# EAGLE board ledterne_test-display (EAGLE 7.3.0)
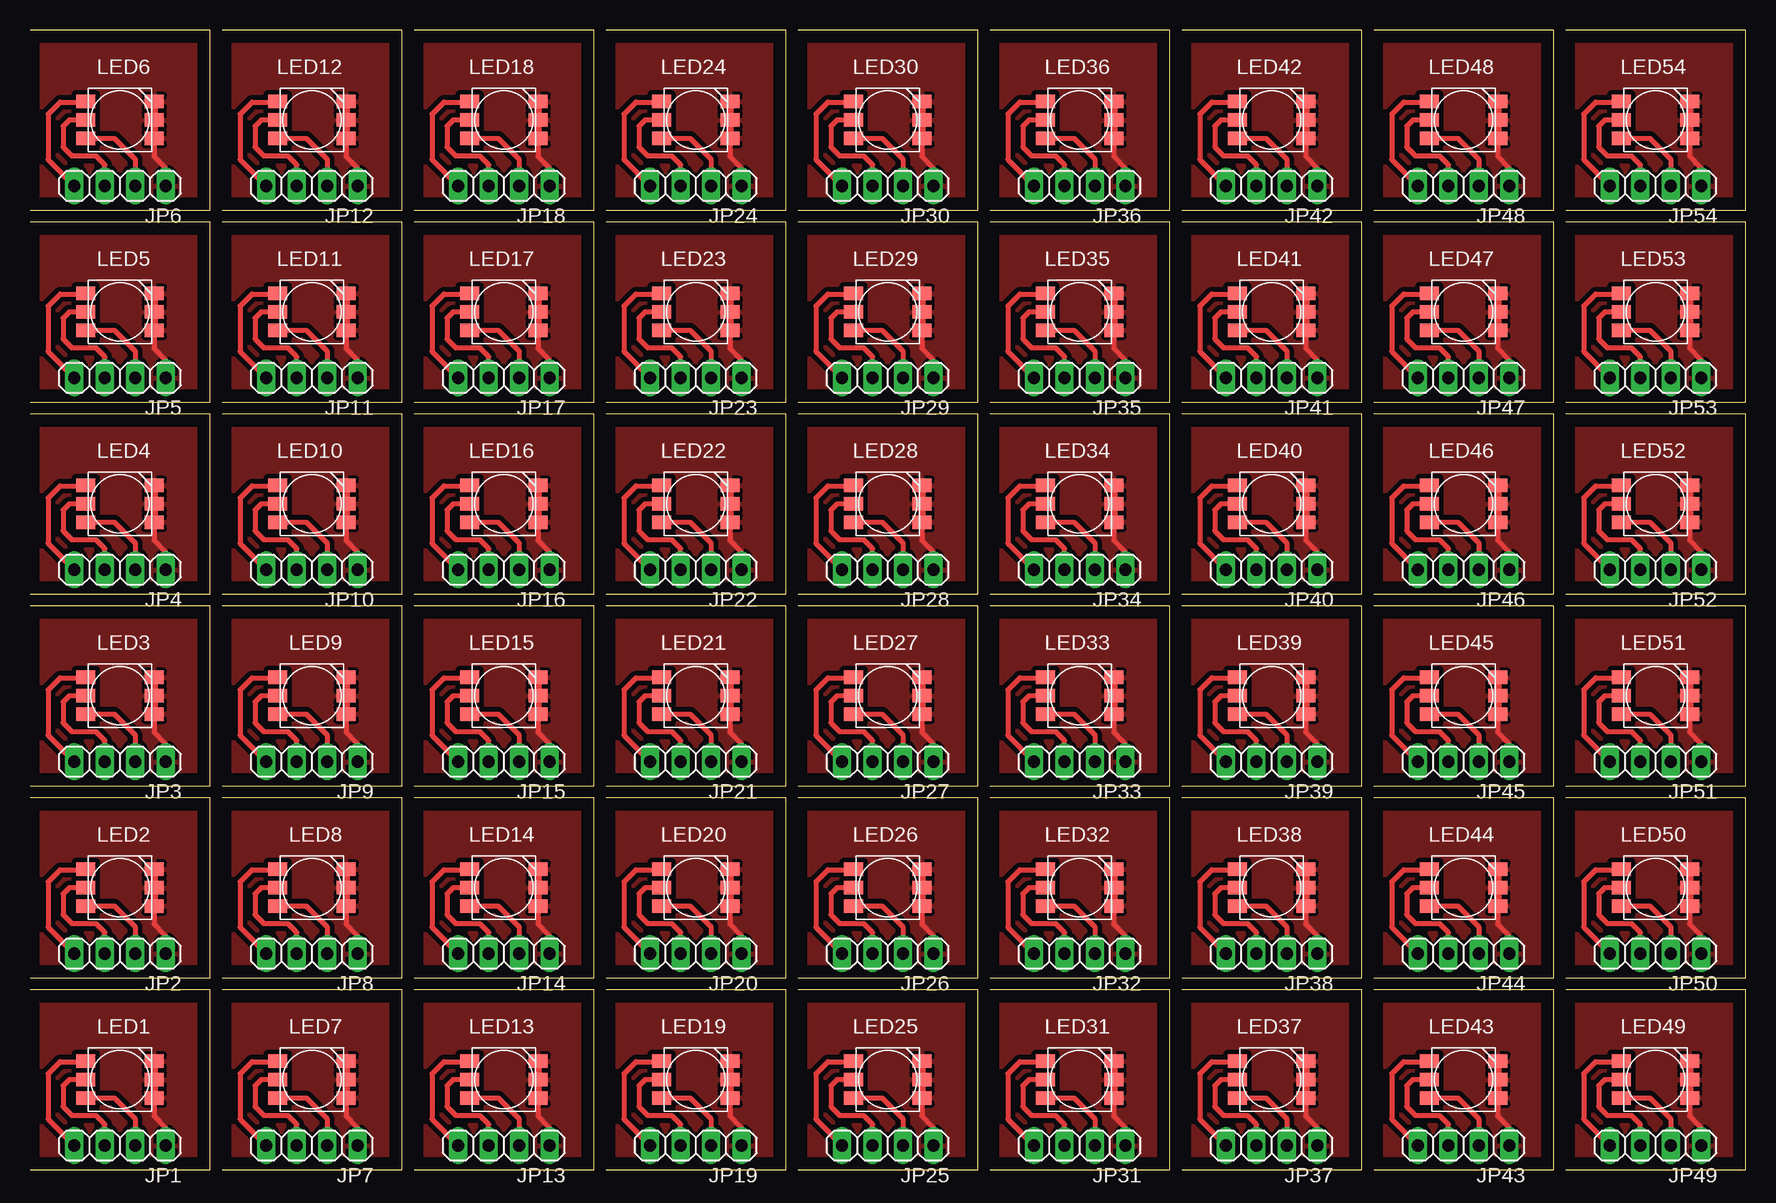
[diagram p0: board, top side]

Size 143 x 95 mm. Coordinates in mm from the lower left corner, seen from the top.
Outline: 0,0 15,0 15,15 0,15
Outline: 0,16 15,16 15,31 0,31
Outline: 0,32 15,32 15,47 0,47
Outline: 0,48 15,48 15,63 0,63
Outline: 0,64 15,64 15,79 0,79
Outline: 0,80 15,80 15,95 0,95
Outline: 16,0 31,0 31,15 16,15
Outline: 16,16 31,16 31,31 16,31
Outline: 16,32 31,32 31,47 16,47
Outline: 16,48 31,48 31,63 16,63
Outline: 16,64 31,64 31,79 16,79
Outline: 16,80 31,80 31,95 16,95
Outline: 32,0 47,0 47,15 32,15
Outline: 32,16 47,16 47,31 32,31
Outline: 32,32 47,32 47,47 32,47
Outline: 32,48 47,48 47,63 32,63
Outline: 32,64 47,64 47,79 32,79
Outline: 32,80 47,80 47,95 32,95
Outline: 48,0 63,0 63,15 48,15
Outline: 48,16 63,16 63,31 48,31
Outline: 48,32 63,32 63,47 48,47
Outline: 48,48 63,48 63,63 48,63
Outline: 48,64 63,64 63,79 48,79
Outline: 48,80 63,80 63,95 48,95
Outline: 64,0 79,0 79,15 64,15
Outline: 64,16 79,16 79,31 64,31
Outline: 64,32 79,32 79,47 64,47
Outline: 64,48 79,48 79,63 64,63
Outline: 64,64 79,64 79,79 64,79
Outline: 64,80 79,80 79,95 64,95
Outline: 80,0 95,0 95,15 80,15
Outline: 80,16 95,16 95,31 80,31
Outline: 80,32 95,32 95,47 80,47
Outline: 80,48 95,48 95,63 80,63
Outline: 80,64 95,64 95,79 80,79
Outline: 80,80 95,80 95,95 80,95
Outline: 96,0 111,0 111,15 96,15
Outline: 96,16 111,16 111,31 96,31
Outline: 96,32 111,32 111,47 96,47
Outline: 96,48 111,48 111,63 96,63
Outline: 96,64 111,64 111,79 96,79
Outline: 96,80 111,80 111,95 96,95
Outline: 112,0 127,0 127,15 112,15
Outline: 112,16 127,16 127,31 112,31
Outline: 112,32 127,32 127,47 112,47
Outline: 112,48 127,48 127,63 112,63
Outline: 112,64 127,64 127,79 112,79
Outline: 112,80 127,80 127,95 112,95
Outline: 128,0 143,0 143,15 128,15
Outline: 128,16 143,16 143,31 128,31
Outline: 128,32 143,32 143,47 128,47
Outline: 128,48 143,48 143,63 128,63
Outline: 128,64 143,64 143,79 128,79
Outline: 128,80 143,80 143,95 128,95
Copper layers (1*16): Top 0.035mm / dielectric 1.5mm / Bottom 0.035mm
Design rules "default *": minimum track width 10mil, minimum drill 24mil, track to track 8mil, track to pad 8mil, pad to pad 8mil, via to via 8mil, smd to smd 8mil, copper to edge 40mil, drill to drill 8mil, minimum pad ring 10mil, minimum via ring 8mil, stop-mask expansion 4mil, vias tented up to drill 0mil, thermal gap 10mil

## Footprints (pad centres in the part's own frame; a part is rotated, then mirrored left to right if it is on the bottom)
1X04 = drill 1.016 long: 1 -3.81,0; 2 -1.27,0; 3 1.27,0; 4 3.81,0
SMD_5252 = smd 1.6 x 1.116: P1 -2.85,-1.54; P2 -2.85,0; P3 -2.85,1.54; P4 2.85,1.54; P5 2.85,0; P6 2.85,-1.54

## Placement (x,y rotation side)
JP1  [1X04]  7.5,2 180 top
JP2  [1X04]  7.5,18 180 top
JP3  [1X04]  7.5,34 180 top
JP4  [1X04]  7.5,50 180 top
JP5  [1X04]  7.5,66 180 top
JP6  [1X04]  7.5,82 180 top
JP7  [1X04]  23.5,2 180 top
JP8  [1X04]  23.5,18 180 top
JP9  [1X04]  23.5,34 180 top
JP10  [1X04]  23.5,50 180 top
JP11  [1X04]  23.5,66 180 top
JP12  [1X04]  23.5,82 180 top
JP13  [1X04]  39.5,2 180 top
JP14  [1X04]  39.5,18 180 top
JP15  [1X04]  39.5,34 180 top
JP16  [1X04]  39.5,50 180 top
JP17  [1X04]  39.5,66 180 top
JP18  [1X04]  39.5,82 180 top
JP19  [1X04]  55.5,2 180 top
JP20  [1X04]  55.5,18 180 top
JP21  [1X04]  55.5,34 180 top
JP22  [1X04]  55.5,50 180 top
JP23  [1X04]  55.5,66 180 top
JP24  [1X04]  55.5,82 180 top
JP25  [1X04]  71.5,2 180 top
JP26  [1X04]  71.5,18 180 top
JP27  [1X04]  71.5,34 180 top
JP28  [1X04]  71.5,50 180 top
JP29  [1X04]  71.5,66 180 top
JP30  [1X04]  71.5,82 180 top
JP31  [1X04]  87.5,2 180 top
JP32  [1X04]  87.5,18 180 top
JP33  [1X04]  87.5,34 180 top
JP34  [1X04]  87.5,50 180 top
JP35  [1X04]  87.5,66 180 top
JP36  [1X04]  87.5,82 180 top
JP37  [1X04]  103.5,2 180 top
JP38  [1X04]  103.5,18 180 top
JP39  [1X04]  103.5,34 180 top
JP40  [1X04]  103.5,50 180 top
JP41  [1X04]  103.5,66 180 top
JP42  [1X04]  103.5,82 180 top
JP43  [1X04]  119.5,2 180 top
JP44  [1X04]  119.5,18 180 top
JP45  [1X04]  119.5,34 180 top
JP46  [1X04]  119.5,50 180 top
JP47  [1X04]  119.5,66 180 top
JP48  [1X04]  119.5,82 180 top
JP49  [1X04]  135.5,2 180 top
JP50  [1X04]  135.5,18 180 top
JP51  [1X04]  135.5,34 180 top
JP52  [1X04]  135.5,50 180 top
JP53  [1X04]  135.5,66 180 top
JP54  [1X04]  135.5,82 180 top
LED1  RGB-5252  [SMD_5252]  7.5,7.5 180 top
LED2  RGB-5252  [SMD_5252]  7.5,23.5 180 top
LED3  RGB-5252  [SMD_5252]  7.5,39.5 180 top
LED4  RGB-5252  [SMD_5252]  7.5,55.5 180 top
LED5  RGB-5252  [SMD_5252]  7.5,71.5 180 top
LED6  RGB-5252  [SMD_5252]  7.5,87.5 180 top
LED7  RGB-5252  [SMD_5252]  23.5,7.5 180 top
LED8  RGB-5252  [SMD_5252]  23.5,23.5 180 top
LED9  RGB-5252  [SMD_5252]  23.5,39.5 180 top
LED10  RGB-5252  [SMD_5252]  23.5,55.5 180 top
LED11  RGB-5252  [SMD_5252]  23.5,71.5 180 top
LED12  RGB-5252  [SMD_5252]  23.5,87.5 180 top
LED13  RGB-5252  [SMD_5252]  39.5,7.5 180 top
LED14  RGB-5252  [SMD_5252]  39.5,23.5 180 top
LED15  RGB-5252  [SMD_5252]  39.5,39.5 180 top
LED16  RGB-5252  [SMD_5252]  39.5,55.5 180 top
LED17  RGB-5252  [SMD_5252]  39.5,71.5 180 top
LED18  RGB-5252  [SMD_5252]  39.5,87.5 180 top
LED19  RGB-5252  [SMD_5252]  55.5,7.5 180 top
LED20  RGB-5252  [SMD_5252]  55.5,23.5 180 top
LED21  RGB-5252  [SMD_5252]  55.5,39.5 180 top
LED22  RGB-5252  [SMD_5252]  55.5,55.5 180 top
LED23  RGB-5252  [SMD_5252]  55.5,71.5 180 top
LED24  RGB-5252  [SMD_5252]  55.5,87.5 180 top
LED25  RGB-5252  [SMD_5252]  71.5,7.5 180 top
LED26  RGB-5252  [SMD_5252]  71.5,23.5 180 top
LED27  RGB-5252  [SMD_5252]  71.5,39.5 180 top
LED28  RGB-5252  [SMD_5252]  71.5,55.5 180 top
LED29  RGB-5252  [SMD_5252]  71.5,71.5 180 top
LED30  RGB-5252  [SMD_5252]  71.5,87.5 180 top
LED31  RGB-5252  [SMD_5252]  87.5,7.5 180 top
LED32  RGB-5252  [SMD_5252]  87.5,23.5 180 top
LED33  RGB-5252  [SMD_5252]  87.5,39.5 180 top
LED34  RGB-5252  [SMD_5252]  87.5,55.5 180 top
LED35  RGB-5252  [SMD_5252]  87.5,71.5 180 top
LED36  RGB-5252  [SMD_5252]  87.5,87.5 180 top
LED37  RGB-5252  [SMD_5252]  103.5,7.5 180 top
LED38  RGB-5252  [SMD_5252]  103.5,23.5 180 top
LED39  RGB-5252  [SMD_5252]  103.5,39.5 180 top
LED40  RGB-5252  [SMD_5252]  103.5,55.5 180 top
LED41  RGB-5252  [SMD_5252]  103.5,71.5 180 top
LED42  RGB-5252  [SMD_5252]  103.5,87.5 180 top
LED43  RGB-5252  [SMD_5252]  119.5,7.5 180 top
LED44  RGB-5252  [SMD_5252]  119.5,23.5 180 top
LED45  RGB-5252  [SMD_5252]  119.5,39.5 180 top
LED46  RGB-5252  [SMD_5252]  119.5,55.5 180 top
LED47  RGB-5252  [SMD_5252]  119.5,71.5 180 top
LED48  RGB-5252  [SMD_5252]  119.5,87.5 180 top
LED49  RGB-5252  [SMD_5252]  135.5,7.5 180 top
LED50  RGB-5252  [SMD_5252]  135.5,23.5 180 top
LED51  RGB-5252  [SMD_5252]  135.5,39.5 180 top
LED52  RGB-5252  [SMD_5252]  135.5,55.5 180 top
LED53  RGB-5252  [SMD_5252]  135.5,71.5 180 top
LED54  RGB-5252  [SMD_5252]  135.5,87.5 180 top

## Library data of the parts
JP1-JP54 = pinhead
LED1-LED54 = led_rgb

## Nets
GND: JP1.1 LED1.P1 LED1.P2 LED1.P3
GND1: JP2.1 LED2.P1 LED2.P2 LED2.P3
GND2: JP3.1 LED3.P1 LED3.P2 LED3.P3
GND3: JP4.1 LED4.P1 LED4.P2 LED4.P3
GND4: JP5.1 LED5.P1 LED5.P2 LED5.P3
GND5: JP6.1 LED6.P1 LED6.P2 LED6.P3
GND6: JP7.1 LED7.P1 LED7.P2 LED7.P3
GND7: JP8.1 LED8.P1 LED8.P2 LED8.P3
GND8: JP9.1 LED9.P1 LED9.P2 LED9.P3
GND9: JP10.1 LED10.P1 LED10.P2 LED10.P3
GND10: JP11.1 LED11.P1 LED11.P2 LED11.P3
GND11: JP12.1 LED12.P1 LED12.P2 LED12.P3
GND12: JP13.1 LED13.P1 LED13.P2 LED13.P3
GND13: JP14.1 LED14.P1 LED14.P2 LED14.P3
GND14: JP15.1 LED15.P1 LED15.P2 LED15.P3
GND15: JP16.1 LED16.P1 LED16.P2 LED16.P3
GND16: JP17.1 LED17.P1 LED17.P2 LED17.P3
GND17: JP18.1 LED18.P1 LED18.P2 LED18.P3
GND18: JP19.1 LED19.P1 LED19.P2 LED19.P3
GND19: JP20.1 LED20.P1 LED20.P2 LED20.P3
GND20: JP21.1 LED21.P1 LED21.P2 LED21.P3
GND21: JP22.1 LED22.P1 LED22.P2 LED22.P3
GND22: JP23.1 LED23.P1 LED23.P2 LED23.P3
GND23: JP24.1 LED24.P1 LED24.P2 LED24.P3
GND24: JP25.1 LED25.P1 LED25.P2 LED25.P3
GND25: JP26.1 LED26.P1 LED26.P2 LED26.P3
GND26: JP27.1 LED27.P1 LED27.P2 LED27.P3
GND27: JP28.1 LED28.P1 LED28.P2 LED28.P3
GND28: JP29.1 LED29.P1 LED29.P2 LED29.P3
GND29: JP30.1 LED30.P1 LED30.P2 LED30.P3
GND30: JP31.1 LED31.P1 LED31.P2 LED31.P3
GND31: JP32.1 LED32.P1 LED32.P2 LED32.P3
GND32: JP33.1 LED33.P1 LED33.P2 LED33.P3
GND33: JP34.1 LED34.P1 LED34.P2 LED34.P3
GND34: JP35.1 LED35.P1 LED35.P2 LED35.P3
GND35: JP36.1 LED36.P1 LED36.P2 LED36.P3
GND36: JP37.1 LED37.P1 LED37.P2 LED37.P3
GND37: JP38.1 LED38.P1 LED38.P2 LED38.P3
GND38: JP39.1 LED39.P1 LED39.P2 LED39.P3
GND39: JP40.1 LED40.P1 LED40.P2 LED40.P3
GND40: JP41.1 LED41.P1 LED41.P2 LED41.P3
GND41: JP42.1 LED42.P1 LED42.P2 LED42.P3
GND42: JP43.1 LED43.P1 LED43.P2 LED43.P3
GND43: JP44.1 LED44.P1 LED44.P2 LED44.P3
GND44: JP45.1 LED45.P1 LED45.P2 LED45.P3
GND45: JP46.1 LED46.P1 LED46.P2 LED46.P3
GND46: JP47.1 LED47.P1 LED47.P2 LED47.P3
GND47: JP48.1 LED48.P1 LED48.P2 LED48.P3
GND48: JP49.1 LED49.P1 LED49.P2 LED49.P3
GND49: JP50.1 LED50.P1 LED50.P2 LED50.P3
GND50: JP51.1 LED51.P1 LED51.P2 LED51.P3
GND51: JP52.1 LED52.P1 LED52.P2 LED52.P3
GND52: JP53.1 LED53.P1 LED53.P2 LED53.P3
GND53: JP54.1 LED54.P1 LED54.P2 LED54.P3
N$1: JP2.2 LED2.P4
N$2: JP2.3 LED2.P5
N$3: JP1.2 LED1.P4
N$4: JP1.3 LED1.P5
N$5: JP1.4 LED1.P6
N$6: JP2.4 LED2.P6
N$7: JP3.2 LED3.P4
N$8: JP3.3 LED3.P5
N$9: JP3.4 LED3.P6
N$10: JP4.2 LED4.P4
N$11: JP4.3 LED4.P5
N$12: JP4.4 LED4.P6
N$13: JP5.2 LED5.P4
N$14: JP5.3 LED5.P5
N$15: JP5.4 LED5.P6
N$16: JP6.2 LED6.P4
N$17: JP6.3 LED6.P5
N$18: JP6.4 LED6.P6
N$19: JP7.2 LED7.P4
N$20: JP7.3 LED7.P5
N$21: JP7.4 LED7.P6
N$22: JP8.2 LED8.P4
N$23: JP8.3 LED8.P5
N$24: JP8.4 LED8.P6
N$25: JP9.2 LED9.P4
N$26: JP9.3 LED9.P5
N$27: JP9.4 LED9.P6
N$28: JP10.2 LED10.P4
N$29: JP10.3 LED10.P5
N$30: JP10.4 LED10.P6
N$31: JP11.2 LED11.P4
N$32: JP11.3 LED11.P5
N$33: JP11.4 LED11.P6
N$34: JP12.2 LED12.P4
N$35: JP12.3 LED12.P5
N$36: JP12.4 LED12.P6
N$37: JP13.2 LED13.P4
N$38: JP13.3 LED13.P5
N$39: JP13.4 LED13.P6
N$40: JP14.2 LED14.P4
N$41: JP14.3 LED14.P5
N$42: JP14.4 LED14.P6
N$43: JP15.2 LED15.P4
N$44: JP15.3 LED15.P5
N$45: JP15.4 LED15.P6
N$46: JP16.2 LED16.P4
N$47: JP16.3 LED16.P5
N$48: JP16.4 LED16.P6
N$49: JP17.2 LED17.P4
N$50: JP17.3 LED17.P5
N$51: JP17.4 LED17.P6
N$52: JP18.2 LED18.P4
N$53: JP18.3 LED18.P5
N$54: JP18.4 LED18.P6
N$55: JP19.2 LED19.P4
N$56: JP19.3 LED19.P5
N$57: JP19.4 LED19.P6
N$58: JP20.2 LED20.P4
N$59: JP20.3 LED20.P5
N$60: JP20.4 LED20.P6
N$61: JP21.2 LED21.P4
N$62: JP21.3 LED21.P5
N$63: JP21.4 LED21.P6
N$64: JP22.2 LED22.P4
N$65: JP22.3 LED22.P5
N$66: JP22.4 LED22.P6
N$67: JP23.2 LED23.P4
N$68: JP23.3 LED23.P5
N$69: JP23.4 LED23.P6
N$70: JP24.2 LED24.P4
N$71: JP24.3 LED24.P5
N$72: JP24.4 LED24.P6
N$73: JP25.2 LED25.P4
N$74: JP25.3 LED25.P5
N$75: JP25.4 LED25.P6
N$76: JP26.2 LED26.P4
N$77: JP26.3 LED26.P5
N$78: JP26.4 LED26.P6
N$79: JP27.2 LED27.P4
N$80: JP27.3 LED27.P5
N$81: JP27.4 LED27.P6
N$82: JP28.2 LED28.P4
N$83: JP28.3 LED28.P5
N$84: JP28.4 LED28.P6
N$85: JP29.2 LED29.P4
N$86: JP29.3 LED29.P5
N$87: JP29.4 LED29.P6
N$88: JP30.2 LED30.P4
N$89: JP30.3 LED30.P5
N$90: JP30.4 LED30.P6
N$91: JP31.2 LED31.P4
N$92: JP31.3 LED31.P5
N$93: JP31.4 LED31.P6
N$94: JP32.2 LED32.P4
N$95: JP32.3 LED32.P5
N$96: JP32.4 LED32.P6
N$97: JP33.2 LED33.P4
N$98: JP33.3 LED33.P5
N$99: JP33.4 LED33.P6
N$100: JP34.2 LED34.P4
N$101: JP34.3 LED34.P5
N$102: JP34.4 LED34.P6
N$103: JP35.2 LED35.P4
N$104: JP35.3 LED35.P5
N$105: JP35.4 LED35.P6
N$106: JP36.2 LED36.P4
N$107: JP36.3 LED36.P5
N$108: JP36.4 LED36.P6
N$109: JP37.2 LED37.P4
N$110: JP37.3 LED37.P5
N$111: JP37.4 LED37.P6
N$112: JP38.2 LED38.P4
N$113: JP38.3 LED38.P5
N$114: JP38.4 LED38.P6
N$115: JP39.2 LED39.P4
N$116: JP39.3 LED39.P5
N$117: JP39.4 LED39.P6
N$118: JP40.2 LED40.P4
N$119: JP40.3 LED40.P5
N$120: JP40.4 LED40.P6
N$121: JP41.2 LED41.P4
N$122: JP41.3 LED41.P5
N$123: JP41.4 LED41.P6
N$124: JP42.2 LED42.P4
N$125: JP42.3 LED42.P5
N$126: JP42.4 LED42.P6
N$127: JP43.2 LED43.P4
N$128: JP43.3 LED43.P5
N$129: JP43.4 LED43.P6
N$130: JP44.2 LED44.P4
N$131: JP44.3 LED44.P5
N$132: JP44.4 LED44.P6
N$133: JP45.2 LED45.P4
N$134: JP45.3 LED45.P5
N$135: JP45.4 LED45.P6
N$136: JP46.2 LED46.P4
N$137: JP46.3 LED46.P5
N$138: JP46.4 LED46.P6
N$139: JP47.2 LED47.P4
N$140: JP47.3 LED47.P5
N$141: JP47.4 LED47.P6
N$142: JP48.2 LED48.P4
N$143: JP48.3 LED48.P5
N$144: JP48.4 LED48.P6
N$145: JP49.2 LED49.P4
N$146: JP49.3 LED49.P5
N$147: JP49.4 LED49.P6
N$148: JP50.2 LED50.P4
N$149: JP50.3 LED50.P5
N$150: JP50.4 LED50.P6
N$151: JP51.2 LED51.P4
N$152: JP51.3 LED51.P5
N$153: JP51.4 LED51.P6
N$154: JP52.2 LED52.P4
N$155: JP52.3 LED52.P5
N$156: JP52.4 LED52.P6
N$157: JP53.2 LED53.P4
N$158: JP53.3 LED53.P5
N$159: JP53.4 LED53.P6
N$160: JP54.2 LED54.P4
N$161: JP54.3 LED54.P5
N$162: JP54.4 LED54.P6

## Tracks (layer width: path | path; a pad name or v marks a point on that pad's centre or on a via)
GND
  Top 0.406: LED1.P3 10.35,4.46 11.31,3.5 JP1.1
  Top 0.61: LED1.P1 LED1.P2 LED1.P3
  pour Top (isolate 0.4): 1,14 14,14 14,1 1,1
GND1
  Top 0.406: LED2.P3 10.35,20.46 11.31,19.5 JP2.1
  Top 0.61: LED2.P1 LED2.P2 LED2.P3
  pour Top (isolate 0.4): 1,30 14,30 14,17 1,17
GND2
  Top 0.406: LED3.P3 10.35,36.46 11.31,35.5 JP3.1
  Top 0.61: LED3.P1 LED3.P2 LED3.P3
  pour Top (isolate 0.4): 1,46 14,46 14,33 1,33
GND3
  Top 0.406: LED4.P3 10.35,52.46 11.31,51.5 JP4.1
  Top 0.61: LED4.P1 LED4.P2 LED4.P3
  pour Top (isolate 0.4): 1,62 14,62 14,49 1,49
GND4
  Top 0.406: LED5.P3 10.35,68.46 11.31,67.5 JP5.1
  Top 0.61: LED5.P1 LED5.P2 LED5.P3
  pour Top (isolate 0.4): 1,78 14,78 14,65 1,65
GND5
  Top 0.406: LED6.P3 10.35,84.46 11.31,83.5 JP6.1
  Top 0.61: LED6.P1 LED6.P2 LED6.P3
  pour Top (isolate 0.4): 1,94 14,94 14,81 1,81
GND6
  Top 0.406: LED7.P3 26.35,4.46 27.31,3.5 JP7.1
  Top 0.61: LED7.P1 LED7.P2 LED7.P3
  pour Top (isolate 0.4): 17,14 30,14 30,1 17,1
GND7
  Top 0.406: LED8.P3 26.35,20.46 27.31,19.5 JP8.1
  Top 0.61: LED8.P1 LED8.P2 LED8.P3
  pour Top (isolate 0.4): 17,30 30,30 30,17 17,17
GND8
  Top 0.406: LED9.P3 26.35,36.46 27.31,35.5 JP9.1
  Top 0.61: LED9.P1 LED9.P2 LED9.P3
  pour Top (isolate 0.4): 17,46 30,46 30,33 17,33
GND9
  Top 0.406: LED10.P3 26.35,52.46 27.31,51.5 JP10.1
  Top 0.61: LED10.P1 LED10.P2 LED10.P3
  pour Top (isolate 0.4): 17,62 30,62 30,49 17,49
GND10
  Top 0.406: LED11.P3 26.35,68.46 27.31,67.5 JP11.1
  Top 0.61: LED11.P1 LED11.P2 LED11.P3
  pour Top (isolate 0.4): 17,78 30,78 30,65 17,65
GND11
  Top 0.406: LED12.P3 26.35,84.46 27.31,83.5 JP12.1
  Top 0.61: LED12.P1 LED12.P2 LED12.P3
  pour Top (isolate 0.4): 17,94 30,94 30,81 17,81
GND12
  Top 0.406: LED13.P3 42.35,4.46 43.31,3.5 JP13.1
  Top 0.61: LED13.P1 LED13.P2 LED13.P3
  pour Top (isolate 0.4): 33,14 46,14 46,1 33,1
GND13
  Top 0.406: LED14.P3 42.35,20.46 43.31,19.5 JP14.1
  Top 0.61: LED14.P1 LED14.P2 LED14.P3
  pour Top (isolate 0.4): 33,30 46,30 46,17 33,17
GND14
  Top 0.406: LED15.P3 42.35,36.46 43.31,35.5 JP15.1
  Top 0.61: LED15.P1 LED15.P2 LED15.P3
  pour Top (isolate 0.4): 33,46 46,46 46,33 33,33
GND15
  Top 0.406: LED16.P3 42.35,52.46 43.31,51.5 JP16.1
  Top 0.61: LED16.P1 LED16.P2 LED16.P3
  pour Top (isolate 0.4): 33,62 46,62 46,49 33,49
GND16
  Top 0.406: LED17.P3 42.35,68.46 43.31,67.5 JP17.1
  Top 0.61: LED17.P1 LED17.P2 LED17.P3
  pour Top (isolate 0.4): 33,78 46,78 46,65 33,65
GND17
  Top 0.406: LED18.P3 42.35,84.46 43.31,83.5 JP18.1
  Top 0.61: LED18.P1 LED18.P2 LED18.P3
  pour Top (isolate 0.4): 33,94 46,94 46,81 33,81
GND18
  Top 0.406: LED19.P3 58.35,4.46 59.31,3.5 JP19.1
  Top 0.61: LED19.P1 LED19.P2 LED19.P3
  pour Top (isolate 0.4): 49,14 62,14 62,1 49,1
GND19
  Top 0.406: LED20.P3 58.35,20.46 59.31,19.5 JP20.1
  Top 0.61: LED20.P1 LED20.P2 LED20.P3
  pour Top (isolate 0.4): 49,30 62,30 62,17 49,17
GND20
  Top 0.406: LED21.P3 58.35,36.46 59.31,35.5 JP21.1
  Top 0.61: LED21.P1 LED21.P2 LED21.P3
  pour Top (isolate 0.4): 49,46 62,46 62,33 49,33
GND21
  Top 0.406: LED22.P3 58.35,52.46 59.31,51.5 JP22.1
  Top 0.61: LED22.P1 LED22.P2 LED22.P3
  pour Top (isolate 0.4): 49,62 62,62 62,49 49,49
GND22
  Top 0.406: LED23.P3 58.35,68.46 59.31,67.5 JP23.1
  Top 0.61: LED23.P1 LED23.P2 LED23.P3
  pour Top (isolate 0.4): 49,78 62,78 62,65 49,65
GND23
  Top 0.406: LED24.P3 58.35,84.46 59.31,83.5 JP24.1
  Top 0.61: LED24.P1 LED24.P2 LED24.P3
  pour Top (isolate 0.4): 49,94 62,94 62,81 49,81
GND24
  Top 0.406: LED25.P3 74.35,4.46 75.31,3.5 JP25.1
  Top 0.61: LED25.P1 LED25.P2 LED25.P3
  pour Top (isolate 0.4): 65,14 78,14 78,1 65,1
GND25
  Top 0.406: LED26.P3 74.35,20.46 75.31,19.5 JP26.1
  Top 0.61: LED26.P1 LED26.P2 LED26.P3
  pour Top (isolate 0.4): 65,30 78,30 78,17 65,17
GND26
  Top 0.406: LED27.P3 74.35,36.46 75.31,35.5 JP27.1
  Top 0.61: LED27.P1 LED27.P2 LED27.P3
  pour Top (isolate 0.4): 65,46 78,46 78,33 65,33
GND27
  Top 0.406: LED28.P3 74.35,52.46 75.31,51.5 JP28.1
  Top 0.61: LED28.P1 LED28.P2 LED28.P3
  pour Top (isolate 0.4): 65,62 78,62 78,49 65,49
GND28
  Top 0.406: LED29.P3 74.35,68.46 75.31,67.5 JP29.1
  Top 0.61: LED29.P1 LED29.P2 LED29.P3
  pour Top (isolate 0.4): 65,78 78,78 78,65 65,65
GND29
  Top 0.406: LED30.P3 74.35,84.46 75.31,83.5 JP30.1
  Top 0.61: LED30.P1 LED30.P2 LED30.P3
  pour Top (isolate 0.4): 65,94 78,94 78,81 65,81
GND30
  Top 0.406: LED31.P3 90.35,4.46 91.31,3.5 JP31.1
  Top 0.61: LED31.P1 LED31.P2 LED31.P3
  pour Top (isolate 0.4): 81,14 94,14 94,1 81,1
GND31
  Top 0.406: LED32.P3 90.35,20.46 91.31,19.5 JP32.1
  Top 0.61: LED32.P1 LED32.P2 LED32.P3
  pour Top (isolate 0.4): 81,30 94,30 94,17 81,17
GND32
  Top 0.406: LED33.P3 90.35,36.46 91.31,35.5 JP33.1
  Top 0.61: LED33.P1 LED33.P2 LED33.P3
  pour Top (isolate 0.4): 81,46 94,46 94,33 81,33
GND33
  Top 0.406: LED34.P3 90.35,52.46 91.31,51.5 JP34.1
  Top 0.61: LED34.P1 LED34.P2 LED34.P3
  pour Top (isolate 0.4): 81,62 94,62 94,49 81,49
GND34
  Top 0.406: LED35.P3 90.35,68.46 91.31,67.5 JP35.1
  Top 0.61: LED35.P1 LED35.P2 LED35.P3
  pour Top (isolate 0.4): 81,78 94,78 94,65 81,65
GND35
  Top 0.406: LED36.P3 90.35,84.46 91.31,83.5 JP36.1
  Top 0.61: LED36.P1 LED36.P2 LED36.P3
  pour Top (isolate 0.4): 81,94 94,94 94,81 81,81
GND36
  Top 0.406: LED37.P3 106.35,4.46 107.31,3.5 JP37.1
  Top 0.61: LED37.P1 LED37.P2 LED37.P3
  pour Top (isolate 0.4): 97,14 110,14 110,1 97,1
GND37
  Top 0.406: LED38.P3 106.35,20.46 107.31,19.5 JP38.1
  Top 0.61: LED38.P1 LED38.P2 LED38.P3
  pour Top (isolate 0.4): 97,30 110,30 110,17 97,17
GND38
  Top 0.406: LED39.P3 106.35,36.46 107.31,35.5 JP39.1
  Top 0.61: LED39.P1 LED39.P2 LED39.P3
  pour Top (isolate 0.4): 97,46 110,46 110,33 97,33
GND39
  Top 0.406: LED40.P3 106.35,52.46 107.31,51.5 JP40.1
  Top 0.61: LED40.P1 LED40.P2 LED40.P3
  pour Top (isolate 0.4): 97,62 110,62 110,49 97,49
GND40
  Top 0.406: LED41.P3 106.35,68.46 107.31,67.5 JP41.1
  Top 0.61: LED41.P1 LED41.P2 LED41.P3
  pour Top (isolate 0.4): 97,78 110,78 110,65 97,65
GND41
  Top 0.406: LED42.P3 106.35,84.46 107.31,83.5 JP42.1
  Top 0.61: LED42.P1 LED42.P2 LED42.P3
  pour Top (isolate 0.4): 97,94 110,94 110,81 97,81
GND42
  Top 0.406: LED43.P3 122.35,4.46 123.31,3.5 JP43.1
  Top 0.61: LED43.P1 LED43.P2 LED43.P3
  pour Top (isolate 0.4): 113,14 126,14 126,1 113,1
GND43
  Top 0.406: LED44.P3 122.35,20.46 123.31,19.5 JP44.1
  Top 0.61: LED44.P1 LED44.P2 LED44.P3
  pour Top (isolate 0.4): 113,30 126,30 126,17 113,17
GND44
  Top 0.406: LED45.P3 122.35,36.46 123.31,35.5 JP45.1
  Top 0.61: LED45.P1 LED45.P2 LED45.P3
  pour Top (isolate 0.4): 113,46 126,46 126,33 113,33
GND45
  Top 0.406: LED46.P3 122.35,52.46 123.31,51.5 JP46.1
  Top 0.61: LED46.P1 LED46.P2 LED46.P3
  pour Top (isolate 0.4): 113,62 126,62 126,49 113,49
GND46
  Top 0.406: LED47.P3 122.35,68.46 123.31,67.5 JP47.1
  Top 0.61: LED47.P1 LED47.P2 LED47.P3
  pour Top (isolate 0.4): 113,78 126,78 126,65 113,65
GND47
  Top 0.406: LED48.P3 122.35,84.46 123.31,83.5 JP48.1
  Top 0.61: LED48.P1 LED48.P2 LED48.P3
  pour Top (isolate 0.4): 113,94 126,94 126,81 113,81
GND48
  Top 0.406: LED49.P3 138.35,4.46 139.31,3.5 JP49.1
  Top 0.61: LED49.P1 LED49.P2 LED49.P3
  pour Top (isolate 0.4): 129,14 142,14 142,1 129,1
GND49
  Top 0.406: LED50.P3 138.35,20.46 139.31,19.5 JP50.1
  Top 0.61: LED50.P1 LED50.P2 LED50.P3
  pour Top (isolate 0.4): 129,30 142,30 142,17 129,17
GND50
  Top 0.406: LED51.P3 138.35,36.46 139.31,35.5 JP51.1
  Top 0.61: LED51.P1 LED51.P2 LED51.P3
  pour Top (isolate 0.4): 129,46 142,46 142,33 129,33
GND51
  Top 0.406: LED52.P3 138.35,52.46 139.31,51.5 JP52.1
  Top 0.61: LED52.P1 LED52.P2 LED52.P3
  pour Top (isolate 0.4): 129,62 142,62 142,49 129,49
GND52
  Top 0.406: LED53.P3 138.35,68.46 139.31,67.5 JP53.1
  Top 0.61: LED53.P1 LED53.P2 LED53.P3
  pour Top (isolate 0.4): 129,78 142,78 142,65 129,65
GND53
  Top 0.406: LED54.P3 138.35,84.46 139.31,83.5 JP54.1
  Top 0.61: LED54.P1 LED54.P2 LED54.P3
  pour Top (isolate 0.4): 129,94 142,94 142,81 129,81
N$1
  Top 0.406: LED2.P4 7.04,21.96 8.77,20.23 JP2.2
N$2
  Top 0.406: LED2.P5 3.25,23.5 2.75,23 2.75,21.25 3.5,20.5 5.5,20.5 6.23,19.77 JP2.3
N$3
  Top 0.406: LED1.P4 7.04,5.96 8.77,4.23 JP1.2
N$4
  Top 0.406: LED1.P5 3.25,7.5 2.75,7 2.75,5.25 3.5,4.5 5.5,4.5 6.23,3.77 JP1.3
N$5
  Top 0.406: 4.61,9 2.5,9 1.5,8 1.5,4.19 JP1.4
  Top 0.61: 4.61,9 LED1.P6
N$6
  Top 0.406: 4.61,25 2.5,25 1.5,24 1.5,20.19 JP2.4
  Top 0.61: 4.61,25 LED2.P6
N$7
  Top 0.406: LED3.P4 7.04,37.96 8.77,36.23 JP3.2
N$8
  Top 0.406: LED3.P5 3.25,39.5 2.75,39 2.75,37.25 3.5,36.5 5.5,36.5 6.23,35.77 JP3.3
N$9
  Top 0.406: 4.61,41 2.5,41 1.5,40 1.5,36.19 JP3.4
  Top 0.61: 4.61,41 LED3.P6
N$10
  Top 0.406: LED4.P4 7.04,53.96 8.77,52.23 JP4.2
N$11
  Top 0.406: LED4.P5 3.25,55.5 2.75,55 2.75,53.25 3.5,52.5 5.5,52.5 6.23,51.77 JP4.3
N$12
  Top 0.406: 4.61,57 2.5,57 1.5,56 1.5,52.19 JP4.4
  Top 0.61: 4.61,57 LED4.P6
N$13
  Top 0.406: LED5.P4 7.04,69.96 8.77,68.23 JP5.2
N$14
  Top 0.406: LED5.P5 3.25,71.5 2.75,71 2.75,69.25 3.5,68.5 5.5,68.5 6.23,67.77 JP5.3
N$15
  Top 0.406: 4.61,73 2.5,73 1.5,72 1.5,68.19 JP5.4
  Top 0.61: 4.61,73 LED5.P6
N$16
  Top 0.406: LED6.P4 7.04,85.96 8.77,84.23 JP6.2
N$17
  Top 0.406: LED6.P5 3.25,87.5 2.75,87 2.75,85.25 3.5,84.5 5.5,84.5 6.23,83.77 JP6.3
N$18
  Top 0.406: 4.61,89 2.5,89 1.5,88 1.5,84.19 JP6.4
  Top 0.61: 4.61,89 LED6.P6
N$19
  Top 0.406: LED7.P4 23.04,5.96 24.77,4.23 JP7.2
N$20
  Top 0.406: LED7.P5 19.25,7.5 18.75,7 18.75,5.25 19.5,4.5 21.5,4.5 22.23,3.77 JP7.3
N$21
  Top 0.406: 20.61,9 18.5,9 17.5,8 17.5,4.19 JP7.4
  Top 0.61: 20.61,9 LED7.P6
N$22
  Top 0.406: LED8.P4 23.04,21.96 24.77,20.23 JP8.2
N$23
  Top 0.406: LED8.P5 19.25,23.5 18.75,23 18.75,21.25 19.5,20.5 21.5,20.5 22.23,19.77 JP8.3
N$24
  Top 0.406: 20.61,25 18.5,25 17.5,24 17.5,20.19 JP8.4
  Top 0.61: 20.61,25 LED8.P6
N$25
  Top 0.406: LED9.P4 23.04,37.96 24.77,36.23 JP9.2
N$26
  Top 0.406: LED9.P5 19.25,39.5 18.75,39 18.75,37.25 19.5,36.5 21.5,36.5 22.23,35.77 JP9.3
N$27
  Top 0.406: 20.61,41 18.5,41 17.5,40 17.5,36.19 JP9.4
  Top 0.61: 20.61,41 LED9.P6
N$28
  Top 0.406: LED10.P4 23.04,53.96 24.77,52.23 JP10.2
N$29
  Top 0.406: LED10.P5 19.25,55.5 18.75,55 18.75,53.25 19.5,52.5 21.5,52.5 22.23,51.77 JP10.3
N$30
  Top 0.406: 20.61,57 18.5,57 17.5,56 17.5,52.19 JP10.4
  Top 0.61: 20.61,57 LED10.P6
N$31
  Top 0.406: LED11.P4 23.04,69.96 24.77,68.23 JP11.2
N$32
  Top 0.406: LED11.P5 19.25,71.5 18.75,71 18.75,69.25 19.5,68.5 21.5,68.5 22.23,67.77 JP11.3
N$33
  Top 0.406: 20.61,73 18.5,73 17.5,72 17.5,68.19 JP11.4
  Top 0.61: 20.61,73 LED11.P6
N$34
  Top 0.406: LED12.P4 23.04,85.96 24.77,84.23 JP12.2
N$35
  Top 0.406: LED12.P5 19.25,87.5 18.75,87 18.75,85.25 19.5,84.5 21.5,84.5 22.23,83.77 JP12.3
N$36
  Top 0.406: 20.61,89 18.5,89 17.5,88 17.5,84.19 JP12.4
  Top 0.61: 20.61,89 LED12.P6
N$37
  Top 0.406: LED13.P4 39.04,5.96 40.77,4.23 JP13.2
N$38
  Top 0.406: LED13.P5 35.25,7.5 34.75,7 34.75,5.25 35.5,4.5 37.5,4.5 38.23,3.77 JP13.3
N$39
  Top 0.406: 36.61,9 34.5,9 33.5,8 33.5,4.19 JP13.4
  Top 0.61: 36.61,9 LED13.P6
N$40
  Top 0.406: LED14.P4 39.04,21.96 40.77,20.23 JP14.2
N$41
  Top 0.406: LED14.P5 35.25,23.5 34.75,23 34.75,21.25 35.5,20.5 37.5,20.5 38.23,19.77 JP14.3
N$42
  Top 0.406: 36.61,25 34.5,25 33.5,24 33.5,20.19 JP14.4
  Top 0.61: 36.61,25 LED14.P6
N$43
  Top 0.406: LED15.P4 39.04,37.96 40.77,36.23 JP15.2
N$44
  Top 0.406: LED15.P5 35.25,39.5 34.75,39 34.75,37.25 35.5,36.5 37.5,36.5 38.23,35.77 JP15.3
N$45
  Top 0.406: 36.61,41 34.5,41 33.5,40 33.5,36.19 JP15.4
  Top 0.61: 36.61,41 LED15.P6
N$46
  Top 0.406: LED16.P4 39.04,53.96 40.77,52.23 JP16.2
N$47
  Top 0.406: LED16.P5 35.25,55.5 34.75,55 34.75,53.25 35.5,52.5 37.5,52.5 38.23,51.77 JP16.3
N$48
  Top 0.406: 36.61,57 34.5,57 33.5,56 33.5,52.19 JP16.4
  Top 0.61: 36.61,57 LED16.P6
N$49
  Top 0.406: LED17.P4 39.04,69.96 40.77,68.23 JP17.2
N$50
  Top 0.406: LED17.P5 35.25,71.5 34.75,71 34.75,69.25 35.5,68.5 37.5,68.5 38.23,67.77 JP17.3
N$51
  Top 0.406: 36.61,73 34.5,73 33.5,72 33.5,68.19 JP17.4
  Top 0.61: 36.61,73 LED17.P6
N$52
  Top 0.406: LED18.P4 39.04,85.96 40.77,84.23 JP18.2
N$53
  Top 0.406: LED18.P5 35.25,87.5 34.75,87 34.75,85.25 35.5,84.5 37.5,84.5 38.23,83.77 JP18.3
N$54
  Top 0.406: 36.61,89 34.5,89 33.5,88 33.5,84.19 JP18.4
  Top 0.61: 36.61,89 LED18.P6
N$55
  Top 0.406: LED19.P4 55.04,5.96 56.77,4.23 JP19.2
N$56
  Top 0.406: LED19.P5 51.25,7.5 50.75,7 50.75,5.25 51.5,4.5 53.5,4.5 54.23,3.77 JP19.3
N$57
  Top 0.406: 52.61,9 50.5,9 49.5,8 49.5,4.19 JP19.4
  Top 0.61: 52.61,9 LED19.P6
N$58
  Top 0.406: LED20.P4 55.04,21.96 56.77,20.23 JP20.2
N$59
  Top 0.406: LED20.P5 51.25,23.5 50.75,23 50.75,21.25 51.5,20.5 53.5,20.5 54.23,19.77 JP20.3
N$60
  Top 0.406: 52.61,25 50.5,25 49.5,24 49.5,20.19 JP20.4
  Top 0.61: 52.61,25 LED20.P6
N$61
  Top 0.406: LED21.P4 55.04,37.96 56.77,36.23 JP21.2
N$62
  Top 0.406: LED21.P5 51.25,39.5 50.75,39 50.75,37.25 51.5,36.5 53.5,36.5 54.23,35.77 JP21.3
N$63
  Top 0.406: 52.61,41 50.5,41 49.5,40 49.5,36.19 JP21.4
  Top 0.61: 52.61,41 LED21.P6
N$64
  Top 0.406: LED22.P4 55.04,53.96 56.77,52.23 JP22.2
N$65
  Top 0.406: LED22.P5 51.25,55.5 50.75,55 50.75,53.25 51.5,52.5 53.5,52.5 54.23,51.77 JP22.3
N$66
  Top 0.406: 52.61,57 50.5,57 49.5,56 49.5,52.19 JP22.4
  Top 0.61: 52.61,57 LED22.P6
N$67
  Top 0.406: LED23.P4 55.04,69.96 56.77,68.23 JP23.2
N$68
  Top 0.406: LED23.P5 51.25,71.5 50.75,71 50.75,69.25 51.5,68.5 53.5,68.5 54.23,67.77 JP23.3
N$69
  Top 0.406: 52.61,73 50.5,73 49.5,72 49.5,68.19 JP23.4
  Top 0.61: 52.61,73 LED23.P6
N$70
  Top 0.406: LED24.P4 55.04,85.96 56.77,84.23 JP24.2
N$71
  Top 0.406: LED24.P5 51.25,87.5 50.75,87 50.75,85.25 51.5,84.5 53.5,84.5 54.23,83.77 JP24.3
N$72
  Top 0.406: 52.61,89 50.5,89 49.5,88 49.5,84.19 JP24.4
  Top 0.61: 52.61,89 LED24.P6
N$73
  Top 0.406: LED25.P4 71.04,5.96 72.77,4.23 JP25.2
N$74
  Top 0.406: LED25.P5 67.25,7.5 66.75,7 66.75,5.25 67.5,4.5 69.5,4.5 70.23,3.77 JP25.3
N$75
  Top 0.406: 68.61,9 66.5,9 65.5,8 65.5,4.19 JP25.4
  Top 0.61: 68.61,9 LED25.P6
N$76
  Top 0.406: LED26.P4 71.04,21.96 72.77,20.23 JP26.2
N$77
  Top 0.406: LED26.P5 67.25,23.5 66.75,23 66.75,21.25 67.5,20.5 69.5,20.5 70.23,19.77 JP26.3
N$78
  Top 0.406: 68.61,25 66.5,25 65.5,24 65.5,20.19 JP26.4
  Top 0.61: 68.61,25 LED26.P6
N$79
  Top 0.406: LED27.P4 71.04,37.96 72.77,36.23 JP27.2
N$80
  Top 0.406: LED27.P5 67.25,39.5 66.75,39 66.75,37.25 67.5,36.5 69.5,36.5 70.23,35.77 JP27.3
N$81
  Top 0.406: 68.61,41 66.5,41 65.5,40 65.5,36.19 JP27.4
  Top 0.61: 68.61,41 LED27.P6
N$82
  Top 0.406: LED28.P4 71.04,53.96 72.77,52.23 JP28.2
N$83
  Top 0.406: LED28.P5 67.25,55.5 66.75,55 66.75,53.25 67.5,52.5 69.5,52.5 70.23,51.77 JP28.3
N$84
  Top 0.406: 68.61,57 66.5,57 65.5,56 65.5,52.19 JP28.4
  Top 0.61: 68.61,57 LED28.P6
N$85
  Top 0.406: LED29.P4 71.04,69.96 72.77,68.23 JP29.2
N$86
  Top 0.406: LED29.P5 67.25,71.5 66.75,71 66.75,69.25 67.5,68.5 69.5,68.5 70.23,67.77 JP29.3
N$87
  Top 0.406: 68.61,73 66.5,73 65.5,72 65.5,68.19 JP29.4
  Top 0.61: 68.61,73 LED29.P6
N$88
  Top 0.406: LED30.P4 71.04,85.96 72.77,84.23 JP30.2
N$89
  Top 0.406: LED30.P5 67.25,87.5 66.75,87 66.75,85.25 67.5,84.5 69.5,84.5 70.23,83.77 JP30.3
N$90
  Top 0.406: 68.61,89 66.5,89 65.5,88 65.5,84.19 JP30.4
  Top 0.61: 68.61,89 LED30.P6
N$91
  Top 0.406: LED31.P4 87.04,5.96 88.77,4.23 JP31.2
N$92
  Top 0.406: LED31.P5 83.25,7.5 82.75,7 82.75,5.25 83.5,4.5 85.5,4.5 86.23,3.77 JP31.3
N$93
  Top 0.406: 84.61,9 82.5,9 81.5,8 81.5,4.19 JP31.4
  Top 0.61: 84.61,9 LED31.P6
N$94
  Top 0.406: LED32.P4 87.04,21.96 88.77,20.23 JP32.2
N$95
  Top 0.406: LED32.P5 83.25,23.5 82.75,23 82.75,21.25 83.5,20.5 85.5,20.5 86.23,19.77 JP32.3
N$96
  Top 0.406: 84.61,25 82.5,25 81.5,24 81.5,20.19 JP32.4
  Top 0.61: 84.61,25 LED32.P6
N$97
  Top 0.406: LED33.P4 87.04,37.96 88.77,36.23 JP33.2
N$98
  Top 0.406: LED33.P5 83.25,39.5 82.75,39 82.75,37.25 83.5,36.5 85.5,36.5 86.23,35.77 JP33.3
N$99
  Top 0.406: 84.61,41 82.5,41 81.5,40 81.5,36.19 JP33.4
  Top 0.61: 84.61,41 LED33.P6
N$100
  Top 0.406: LED34.P4 87.04,53.96 88.77,52.23 JP34.2
N$101
  Top 0.406: LED34.P5 83.25,55.5 82.75,55 82.75,53.25 83.5,52.5 85.5,52.5 86.23,51.77 JP34.3
N$102
  Top 0.406: 84.61,57 82.5,57 81.5,56 81.5,52.19 JP34.4
  Top 0.61: 84.61,57 LED34.P6
N$103
  Top 0.406: LED35.P4 87.04,69.96 88.77,68.23 JP35.2
N$104
  Top 0.406: LED35.P5 83.25,71.5 82.75,71 82.75,69.25 83.5,68.5 85.5,68.5 86.23,67.77 JP35.3
N$105
  Top 0.406: 84.61,73 82.5,73 81.5,72 81.5,68.19 JP35.4
  Top 0.61: 84.61,73 LED35.P6
N$106
  Top 0.406: LED36.P4 87.04,85.96 88.77,84.23 JP36.2
N$107
  Top 0.406: LED36.P5 83.25,87.5 82.75,87 82.75,85.25 83.5,84.5 85.5,84.5 86.23,83.77 JP36.3
N$108
  Top 0.406: 84.61,89 82.5,89 81.5,88 81.5,84.19 JP36.4
  Top 0.61: 84.61,89 LED36.P6
N$109
  Top 0.406: LED37.P4 103.04,5.96 104.77,4.23 JP37.2
N$110
  Top 0.406: LED37.P5 99.25,7.5 98.75,7 98.75,5.25 99.5,4.5 101.5,4.5 102.23,3.77 JP37.3
N$111
  Top 0.406: 100.61,9 98.5,9 97.5,8 97.5,4.19 JP37.4
  Top 0.61: 100.61,9 LED37.P6
N$112
  Top 0.406: LED38.P4 103.04,21.96 104.77,20.23 JP38.2
N$113
  Top 0.406: LED38.P5 99.25,23.5 98.75,23 98.75,21.25 99.5,20.5 101.5,20.5 102.23,19.77 JP38.3
N$114
  Top 0.406: 100.61,25 98.5,25 97.5,24 97.5,20.19 JP38.4
  Top 0.61: 100.61,25 LED38.P6
N$115
  Top 0.406: LED39.P4 103.04,37.96 104.77,36.23 JP39.2
N$116
  Top 0.406: LED39.P5 99.25,39.5 98.75,39 98.75,37.25 99.5,36.5 101.5,36.5 102.23,35.77 JP39.3
N$117
  Top 0.406: 100.61,41 98.5,41 97.5,40 97.5,36.19 JP39.4
  Top 0.61: 100.61,41 LED39.P6
N$118
  Top 0.406: LED40.P4 103.04,53.96 104.77,52.23 JP40.2
N$119
  Top 0.406: LED40.P5 99.25,55.5 98.75,55 98.75,53.25 99.5,52.5 101.5,52.5 102.23,51.77 JP40.3
N$120
  Top 0.406: 100.61,57 98.5,57 97.5,56 97.5,52.19 JP40.4
  Top 0.61: 100.61,57 LED40.P6
N$121
  Top 0.406: LED41.P4 103.04,69.96 104.77,68.23 JP41.2
N$122
  Top 0.406: LED41.P5 99.25,71.5 98.75,71 98.75,69.25 99.5,68.5 101.5,68.5 102.23,67.77 JP41.3
N$123
  Top 0.406: 100.61,73 98.5,73 97.5,72 97.5,68.19 JP41.4
  Top 0.61: 100.61,73 LED41.P6
N$124
  Top 0.406: LED42.P4 103.04,85.96 104.77,84.23 JP42.2
N$125
  Top 0.406: LED42.P5 99.25,87.5 98.75,87 98.75,85.25 99.5,84.5 101.5,84.5 102.23,83.77 JP42.3
N$126
  Top 0.406: 100.61,89 98.5,89 97.5,88 97.5,84.19 JP42.4
  Top 0.61: 100.61,89 LED42.P6
N$127
  Top 0.406: LED43.P4 119.04,5.96 120.77,4.23 JP43.2
N$128
  Top 0.406: LED43.P5 115.25,7.5 114.75,7 114.75,5.25 115.5,4.5 117.5,4.5 118.23,3.77 JP43.3
N$129
  Top 0.406: 116.61,9 114.5,9 113.5,8 113.5,4.19 JP43.4
  Top 0.61: 116.61,9 LED43.P6
N$130
  Top 0.406: LED44.P4 119.04,21.96 120.77,20.23 JP44.2
N$131
  Top 0.406: LED44.P5 115.25,23.5 114.75,23 114.75,21.25 115.5,20.5 117.5,20.5 118.23,19.77 JP44.3
N$132
  Top 0.406: 116.61,25 114.5,25 113.5,24 113.5,20.19 JP44.4
  Top 0.61: 116.61,25 LED44.P6
N$133
  Top 0.406: LED45.P4 119.04,37.96 120.77,36.23 JP45.2
N$134
  Top 0.406: LED45.P5 115.25,39.5 114.75,39 114.75,37.25 115.5,36.5 117.5,36.5 118.23,35.77 JP45.3
N$135
  Top 0.406: 116.61,41 114.5,41 113.5,40 113.5,36.19 JP45.4
  Top 0.61: 116.61,41 LED45.P6
N$136
  Top 0.406: LED46.P4 119.04,53.96 120.77,52.23 JP46.2
N$137
  Top 0.406: LED46.P5 115.25,55.5 114.75,55 114.75,53.25 115.5,52.5 117.5,52.5 118.23,51.77 JP46.3
N$138
  Top 0.406: 116.61,57 114.5,57 113.5,56 113.5,52.19 JP46.4
  Top 0.61: 116.61,57 LED46.P6
N$139
  Top 0.406: LED47.P4 119.04,69.96 120.77,68.23 JP47.2
N$140
  Top 0.406: LED47.P5 115.25,71.5 114.75,71 114.75,69.25 115.5,68.5 117.5,68.5 118.23,67.77 JP47.3
N$141
  Top 0.406: 116.61,73 114.5,73 113.5,72 113.5,68.19 JP47.4
  Top 0.61: 116.61,73 LED47.P6
N$142
  Top 0.406: LED48.P4 119.04,85.96 120.77,84.23 JP48.2
N$143
  Top 0.406: LED48.P5 115.25,87.5 114.75,87 114.75,85.25 115.5,84.5 117.5,84.5 118.23,83.77 JP48.3
N$144
  Top 0.406: 116.61,89 114.5,89 113.5,88 113.5,84.19 JP48.4
  Top 0.61: 116.61,89 LED48.P6
N$145
  Top 0.406: LED49.P4 135.04,5.96 136.77,4.23 JP49.2
N$146
  Top 0.406: LED49.P5 131.25,7.5 130.75,7 130.75,5.25 131.5,4.5 133.5,4.5 134.23,3.77 JP49.3
N$147
  Top 0.406: 132.61,9 130.5,9 129.5,8 129.5,4.19 JP49.4
  Top 0.61: 132.61,9 LED49.P6
N$148
  Top 0.406: LED50.P4 135.04,21.96 136.77,20.23 JP50.2
N$149
  Top 0.406: LED50.P5 131.25,23.5 130.75,23 130.75,21.25 131.5,20.5 133.5,20.5 134.23,19.77 JP50.3
N$150
  Top 0.406: 132.61,25 130.5,25 129.5,24 129.5,20.19 JP50.4
  Top 0.61: 132.61,25 LED50.P6
N$151
  Top 0.406: LED51.P4 135.04,37.96 136.77,36.23 JP51.2
N$152
  Top 0.406: LED51.P5 131.25,39.5 130.75,39 130.75,37.25 131.5,36.5 133.5,36.5 134.23,35.77 JP51.3
N$153
  Top 0.406: 132.61,41 130.5,41 129.5,40 129.5,36.19 JP51.4
  Top 0.61: 132.61,41 LED51.P6
N$154
  Top 0.406: LED52.P4 135.04,53.96 136.77,52.23 JP52.2
N$155
  Top 0.406: LED52.P5 131.25,55.5 130.75,55 130.75,53.25 131.5,52.5 133.5,52.5 134.23,51.77 JP52.3
N$156
  Top 0.406: 132.61,57 130.5,57 129.5,56 129.5,52.19 JP52.4
  Top 0.61: 132.61,57 LED52.P6
N$157
  Top 0.406: LED53.P4 135.04,69.96 136.77,68.23 JP53.2
N$158
  Top 0.406: LED53.P5 131.25,71.5 130.75,71 130.75,69.25 131.5,68.5 133.5,68.5 134.23,67.77 JP53.3
N$159
  Top 0.406: 132.61,73 130.5,73 129.5,72 129.5,68.19 JP53.4
  Top 0.61: 132.61,73 LED53.P6
N$160
  Top 0.406: LED54.P4 135.04,85.96 136.77,84.23 JP54.2
N$161
  Top 0.406: LED54.P5 131.25,87.5 130.75,87 130.75,85.25 131.5,84.5 133.5,84.5 134.23,83.77 JP54.3
N$162
  Top 0.406: 132.61,89 130.5,89 129.5,88 129.5,84.19 JP54.4
  Top 0.61: 132.61,89 LED54.P6